# Altium PCB PCB1.PcbDoc
Units mil, origin at the board's own origin, x right, y up, seen from the top; angles counter-clockwise.
Board outline 950 x 3724.02 mil, 2 copper layers (Top Layer, Bottom Layer); 8 components, 15 nets, 89 pads, 0 vias.
Unrouted connection lines stored in the file: 23.
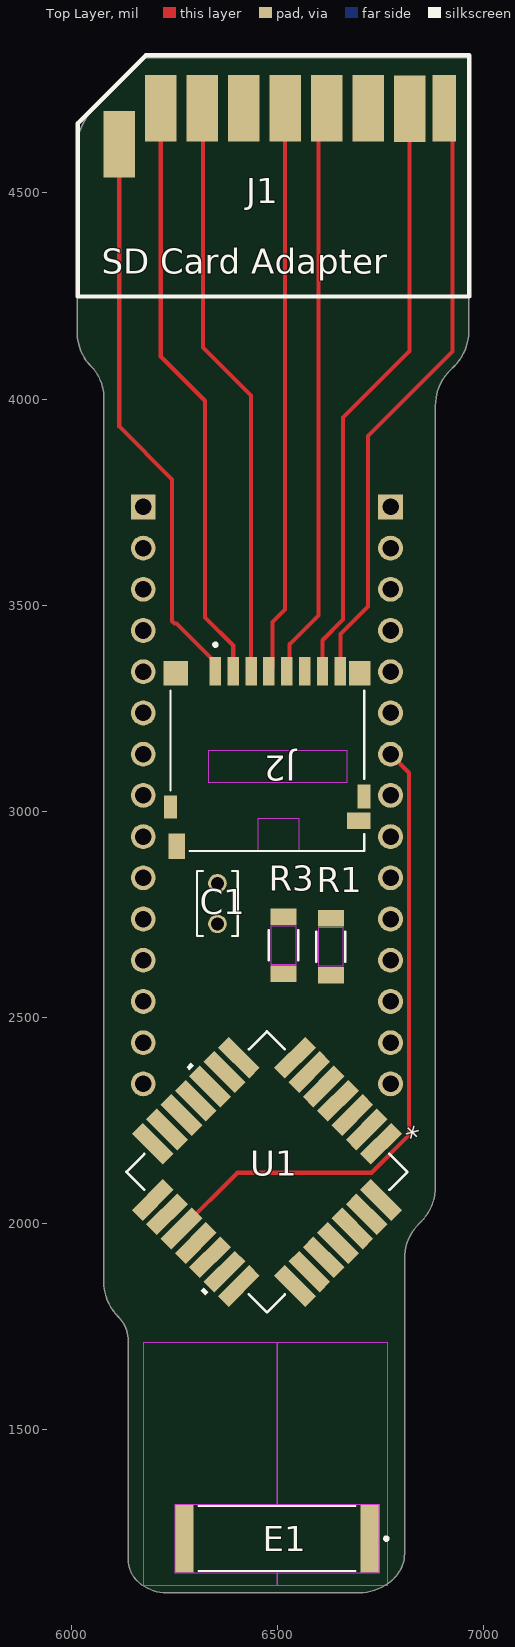
[diagram p0: Top Layer view]
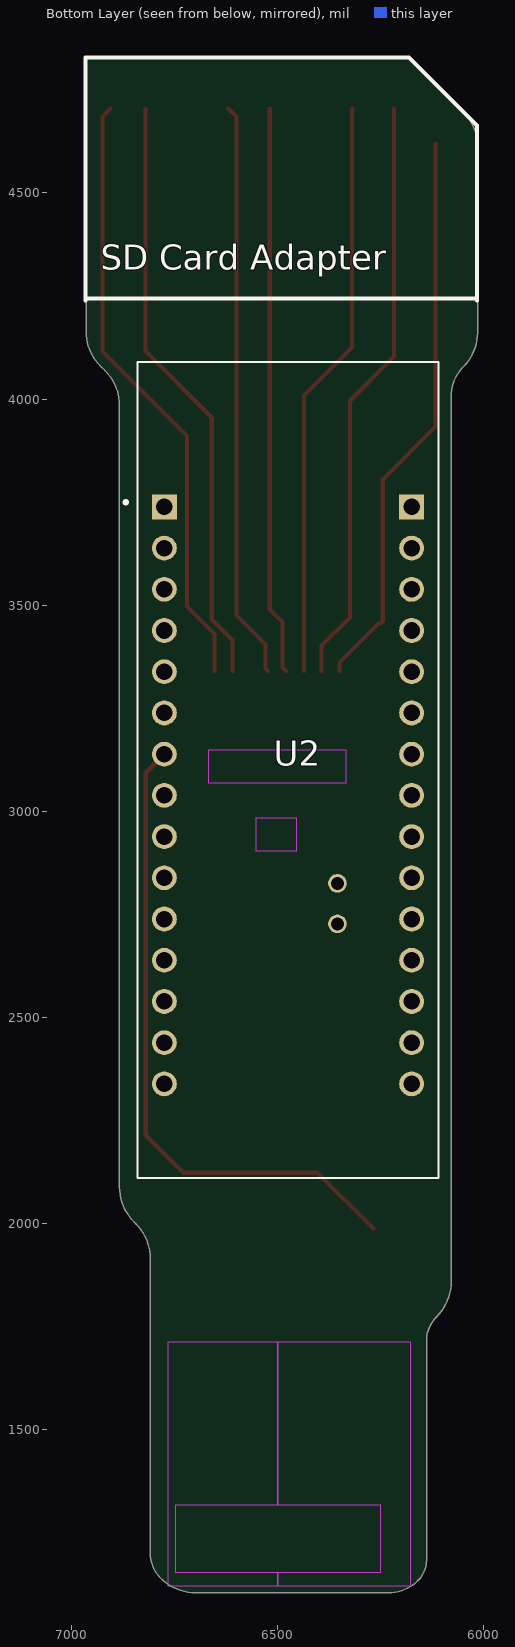
[diagram p1: Bottom Layer view, seen from below]

## Layer stack, top to bottom
Top Solder: solder mask 0.4, Solder Resist, Dk 3.5
Top Layer: signal copper 1.4
Dielectric 1: dielectric 12.6, FR-4, Dk 4.8
Bottom Layer: signal copper 1.4
Bottom Solder: solder mask 0.4, Solder Resist, Dk 3.5

## Board outline
6078.9,1858.9 ccw(c6199.61,1858.9) 6114.25,1773.54 cw(c6054.75,1714.04) 6138.9,1714.04 6138.9,1182.18 ccw(c6207.18,1182.18) 6158.9,1133.9 ccw(c6231.32,1206.32) 6231.32,1103.9 6698.9,1103.9 ccw(c6698.9,1224.61) 6784.25,1139.25 ccw(c6724.75,1198.75) 6808.9,1198.75 6808.9,1913.9 cw(c6929.61,1913.9) 6844.25,1999.25 6848.54,2003.54 ccw(c6763.19,2088.9) 6883.9,2088.9 6883.9,3983.9 cw(c7004.61,3983.9) 6919.25,4069.25 6929.64,4079.64 ccw(c6844.29,4165) 6965,4165 6965,4827.91 6180,4827.91 6050.36,4698.27 ccw(c6135.71,4612.91) 6015,4612.91 6015,4160.73 ccw(c6130.73,4160.73) 6048.9,4078.9 cw(c5976.47,4006.47) 6078.9,4006.47

## Design rules (kind name [scope] priority, off if disabled: settings)
Clearance [All] p1: gap=10 ignorepadtopadclearanceinfootprint=TRUE
PolygonConnect [All] p1: connectstyle=Relief reliefconductorwidth=10 reliefentries=4 polygonreliefangle="90 Angle" airgapwidth=10
RoutingVias [All] p1: holewidth=28 width=50 viastyle="Through Hole" minholewidth=28 minwidth=50 maxholewidth=28 maxwidth=50
SolderMaskExpansion [All] p1: expansion=4 istentingtop=FALSE
SupplyNets "Schematic Supply Nets_1" [InNet('GND')] p1: voltage=0.000
SupplyNets "Schematic Supply Nets" [InNet('VCC')] p2: voltage=0.000
Width [All] p1: maxlimit=10 minlimit=10 preferedwidth=10
30 further rules are at their usual default settings.

## Components (designator, comment, footprint, x,y, rotation, side; value= is the part's Value field where it differs from the comment)
C1 "FK18X5R1A475KR020" CAPRB250W50L400T250H550 6355,2775.79 r90 top
E1 "ACAG1204-915-T" XDCR_ACAG1204-915-T 6499.61,1235 r180 top
J1 "SDCardAdapter" "SD CARD ADAPTER" 6503.75,4503.91 r0 top
J2 "1140084168" AMPHENOL_1140084168 6475.98,3305.55 r180 top
R1 "MMF25SFRE20R" RES_MMF25S_3P5X1P4_YAG 6630,2671 r90 top
R3 "MMF25SFRE20R" RES_MMF25S_3P5X1P4_YAG 6515,2675 r90 top
U1 "317990687" QFN_90687_SEE-M 6475,2125 r225 top
U2 "NUCLEO-L432KC" MODULE_NUCLEO-L432KC 6475,3100 r180 bottom

## Footprints (in the part's own frame and the unit in brackets; to place one, negate y for a bottom-side part, rotate by r counter-clockwise, add the part's x,y. Pads: shape width x height; smd on the part's side, far side on the other; paste and mask are expansions set on the pad)
AMPHENOL_1140084168 [mm]
  rect 0.7x1.75 smd: 1(3.2,-0.875) 2(2.1,-0.875) 3(1,-0.875) 4(-0.1,-0.875) 5(-1.2,-0.875) 6(-2.3,-0.875) 7(-3.4,-0.875) 8(-4.5,-0.875)
  rect 1x1.55 smd: 9(5.575,9.925)
  rect 1.45x1 smd: 10(-5.625,8.35)
  rect 1.5x1.5 smd: S1(5.65,-0.75)
  rect 1.3x1.5 smd: S2(-5.7,-0.75)
  rect 0.8x1.4 smd: S3(5.975,7.5)
  rect 0.8x1.5 smd: S4(-5.95,6.85)
  Keep-Out Layer region: 3.6,4 -4.9,4 -4.9,6 3.6,6
  Keep-Out Layer region: 0.55,8.2 -1.95,8.2 -1.95,10.2 0.55,10.2
  silkscreen extent -5.97,-2.6 5.97,10.2, body extent -6.05,-1.38 5.97,10.27, height 1.4
CAPRB250W50L400T250H550 [mm]
  round 1.15 hole 0.8: 1(-1.25,0) 2(1.25,0)
  silkscreen extent -2,-1.25 2,1.25
MODULE_NUCLEO-L432KC [mm]
  rect 1.53x1.53 / inner round 1.53 / far side rect 1.53x1.53 hole 1.02: CN3_1(-7.62,16.215) CN4_1(7.62,16.215)
  round 1.53 hole 1.02: CN3_2(-7.62,13.675) CN3_3(-7.62,11.135) CN3_4(-7.62,8.595) CN3_5(-7.62,6.055) CN3_6(-7.62,3.515) CN3_7(-7.62,0.975) CN3_8(-7.62,-1.565) CN3_9(-7.62,-4.105) CN3_10(-7.62,-6.645) CN3_11(-7.62,-9.185) CN3_12(-7.62,-11.725) CN3_13(-7.62,-14.265) CN3_14(-7.62,-16.805) CN3_15(-7.62,-19.345) CN4_2(7.62,13.675) CN4_3(7.62,11.135) CN4_4(7.62,8.595) CN4_5(7.62,6.055) CN4_6(7.62,3.515) CN4_7(7.62,0.975) CN4_8(7.62,-1.565) CN4_9(7.62,-4.105) CN4_10(7.62,-6.645) CN4_11(7.62,-9.185) CN4_12(7.62,-11.725) CN4_13(7.62,-14.265) CN4_14(7.62,-16.805) CN4_15(7.62,-19.345)
  silkscreen extent -10.1,-25.14 9.27,25.14, body extent -9.27,-25.82 9.27,26.18, height 8.5
QFN_90687_SEE-M [mil]
  rect 107x37 smd paste+0 mask+0: 1(-244,147.64) 2(-244,98.43) 3(-244,49.21) 4(-244,0) 5(-244,-49.21) 6(-244,-98.43) 7(-244,-147.64) 15(244,-147.64) 16(244,-98.43) 17(244,-49.21) 18(244,0) 19(244,49.21) 20(244,98.43) 21(244,147.64)
  rect 37x107 smd paste+0 mask+0: 8(-147.64,-244) 9(-98.43,-244) 10(-49.21,-244) 11(0,-244) 12(49.21,-244) 13(98.43,-244) 14(147.64,-244) 22(147.64,244) 23(98.43,244) 24(49.21,244) 25(0,244) 26(-49.21,244) 27(-98.43,244) 28(-147.64,244)
  silkscreen extent -241,-318 317,241, body extent -281,-281 281,281, height 98
RES_MMF25S_3P5X1P4_YAG [mil]
  rect 40x63 smd paste+0 mask+0: 1(-69,0) 2(69,0)
  Top Layer keep-out region: -47,-29.5 -47,29.5 47,29.5 47,-29.5
  silkscreen extent -37,-36 37,36, body extent -73,-30 73,30, height 61
"SD CARD ADAPTER" [mm]
  rect 1.94x4.1 smd: 1(-7.271,5.108) 2(-4.716,5.108) 3(-2.16,5.108) 4(0.395,5.108) 5(2.95,5.108) 6(5.506,5.108) 7(8.061,5.083) 9(-9.826,2.908)
  rect 1.46x4.1 smd: 8(10.204,5.108)
  silkscreen extent -12.39,-6.47 11.74,8.38
XDCR_ACAG1204-915-T [mm]
  rect 1.15x4.2 smd: 1(-5.725,0) 2(5.725,0)
  Keep-Out Layer region: 8.2,-12.1 -6.8,-12.1 -6.8,2.9 8.2,2.9
  Keep-Out Layer region: 8.2,-12.1 0,-12.1 0,-2.1 6.3,-2.1 6.3,2.1 0,2.1 0,2.9 8.2,2.9
  Keep-Out Layer region: 0,2.1 -6.3,2.1 -6.3,-2.1 0,-2.1 0,-12.1 -6.8,-12.1 -6.8,2.9 0,2.9
  silkscreen extent -6.83,-2 4.84,2, body extent -6,-2 6,2, height 1.6

## Part data
C1: Package=None, Availability=Unavailable, MF="{'manufacturer': u'TDK Corporation'}", MP=FK18X5R1A475KR020, Price=None
E1: "915MHz ISM, LoRa, Sigfox Chip RF Antenna 910MHz ~ 925MHz 3.42dBi Solder Surface Mount", Package=None, Availability="In Stock", Check_prices=https://www.snapeda.com/parts/ACAG1204-915-T/Abracon+LLC/view-part/?ref=eda, MF="Abracon LLC", MP=ACAG1204-915-T, Price=None, Purchase-URL=https://pricing.snapeda.com/search/part/ACAG1204-915-T/?ref=eda, SnapEDA_Link=https://www.snapeda.com/parts/ACAG1204-915-T/Abracon+LLC/view-part/?ref=snap
J1: "SD card adapter"
J2: "10 (8 + 2) Position Card Connector Secure Digital - microSDâ„¢ Surface Mount, Right Angle Gold", Package=None, Availability="In Stock", Check_prices=https://www.snapeda.com/parts/1140084168/Amphenol+FCI/view-part/?ref=eda, MF="Amphenol ICC", MP=1140084168, Price=None, Purchase-URL=https://pricing.snapeda.com/search/part/1140084168/?ref=eda, SnapEDA_Link=https://www.snapeda.com/parts/1140084168/Amphenol+FCI/view-part/?ref=snap
R1 R3: "No Description Available", Mfr_Name=Yageo
U1: "No Description Available", Mfr_Name=BeagleBoard, RefDes=RefDes, Type=Type
U2: "STM32L432KC, mbed-Enabled Development Nucleo-32 STM32L4 ARMÂ® CortexÂ®-M4 MCU 32-Bit Embedded Evaluation Board", Package=None, Check_prices=https://www.snapeda.com/parts/NUCLEO-L432KC/STMicroelectronics/view-part/?ref=eda, MF=STMicroelectronics, MP=NUCLEO-L432KC, SnapEDA_Link=https://www.snapeda.com/parts/NUCLEO-L432KC/STMicroelectronics/view-part/?ref=snap

## Nets (pads, with @x,y where several pads share a name; then routed paths per layer and width w, separated by ;. In a path a pad name is that pad's centre, name@x,y a point inside that pad or via, vN(x,y) a via of type N, cw(c..) or ccw(c..) an arc to the next point about the centre after c; other vN are vias at no path point)
GND: J1.3 J1.6 J2.6 J2.S1 J2.S2 J2.S3 J2.S4 U1.2 U1.14 U1.16 U1.22 U2.CN3_4
MISO: J1.7 J2.7 U2.CN4_7 | length 1451.5
  Top Layer w10: J2.7 6609.84,3414.84 6660,3465 6660,3955 6821.1,4116.1 J1.7
MOSI: J1.2 J2.3 U2.CN3_5 | length 1414.1
  Top Layer w10: J1.2 6320,4703.1 6320,4125 6436.61,4008.39 J2.3
NetC1_1: C1.1 U1.1
NetE1_1: E1.1 U1.15
NetJ1_8: J1.8 J2.8 | length 1485.7
  Top Layer w10: J2.8 6653.15,3429.87 6720,3496.72 6720,3910 6925,4115 6925,4685.47 J1.8
NetJ1_9: J1.9 J2.1 | length 1377.8
  Top Layer w10: J1.9 6116.89,3933.11 6245,3805 6245,3460.86 6250.86,3455 6255.67,3455 6350,3360.67 J2.1
NetR1_1: R1.1 U1.10
NetR1_2: R1.2 U2.CN3_2
NetR3_1: R3.1 U1.9
NetR3_2: R3.2 U2.CN3_1
NRST: U1.17 U2.CN3_7 | length 1589.5
  Top Layer w10: U1.17 6403.18,2122.77 6728.94,2122.77 6820.12,2213.95 6820.12,3093.27 U2.CN3_7
SCLK: J1.5 J2.5 U2.CN4_11 | length 1405
  Top Layer w10: J2.5 6530,3346.77 6530,3405 6600,3475 6600,4685.1 J1.5
SSEL: J1.1 J2.2 U2.CN3_6 | length 1437.8
  Top Layer w10: J1.1 6217.49,4103.4 6325,3995.89 6325,3470 6393.31,3401.69 J2.2
VCC: C1.2 J1.4 J2.4 U2.CN4_14 | length 1381.3
  Top Layer w10: J2.4 6488.7,3348.78 6488.7,3458.7 6519.3,3489.3 J1.4
pads on no net: E1.2 J2.9 J2.10 U1.3 U1.4 U1.5 U1.6 U1.7 U1.8 U1.11 U1.12 U1.13 U1.18 U1.19 U1.20 U1.21 U1.23 U1.24 U1.25 U1.26 U1.27 U1.28 U2.CN3_3 U2.CN3_8 U2.CN3_9 U2.CN3_10 U2.CN3_11 U2.CN3_12 U2.CN3_13 U2.CN3_14 U2.CN3_15 U2.CN4_1 U2.CN4_2 U2.CN4_3 U2.CN4_4 U2.CN4_5 U2.CN4_6 U2.CN4_8 U2.CN4_9 U2.CN4_10 U2.CN4_12 U2.CN4_13 U2.CN4_15

## Silkscreen, mask and mechanical layers (free items; w line width, h text height)
Mechanical 1:
  the board outline again, w10

## Text inside footprints (layer, text, board x,y; h text height)
J1: Top Overlay "SD Card Adapter" at 6073.75,4303.9 h60; Bottom Overlay "SD Card Adapter" at 6928.75,4313.9 h60
U1: Top Overlay "*" at 6816,2257.76 h50 r225; Mechanical 13 "*" at 6722.66,2164.43 h50 r225